# Altium PCB Shield_MMA8452_bleu.PcbDoc
Units mm, origin at the board's own origin, x right, y up, seen from the top; angles counter-clockwise.
Board outline 70 x 57.5 mm, 4 copper layers (Top Layer, Internal Plane 1, Internal Plane 2, Bottom Layer), stack 0.462 mm thick; 7 components, 7 nets, 116 pads, 0 vias.
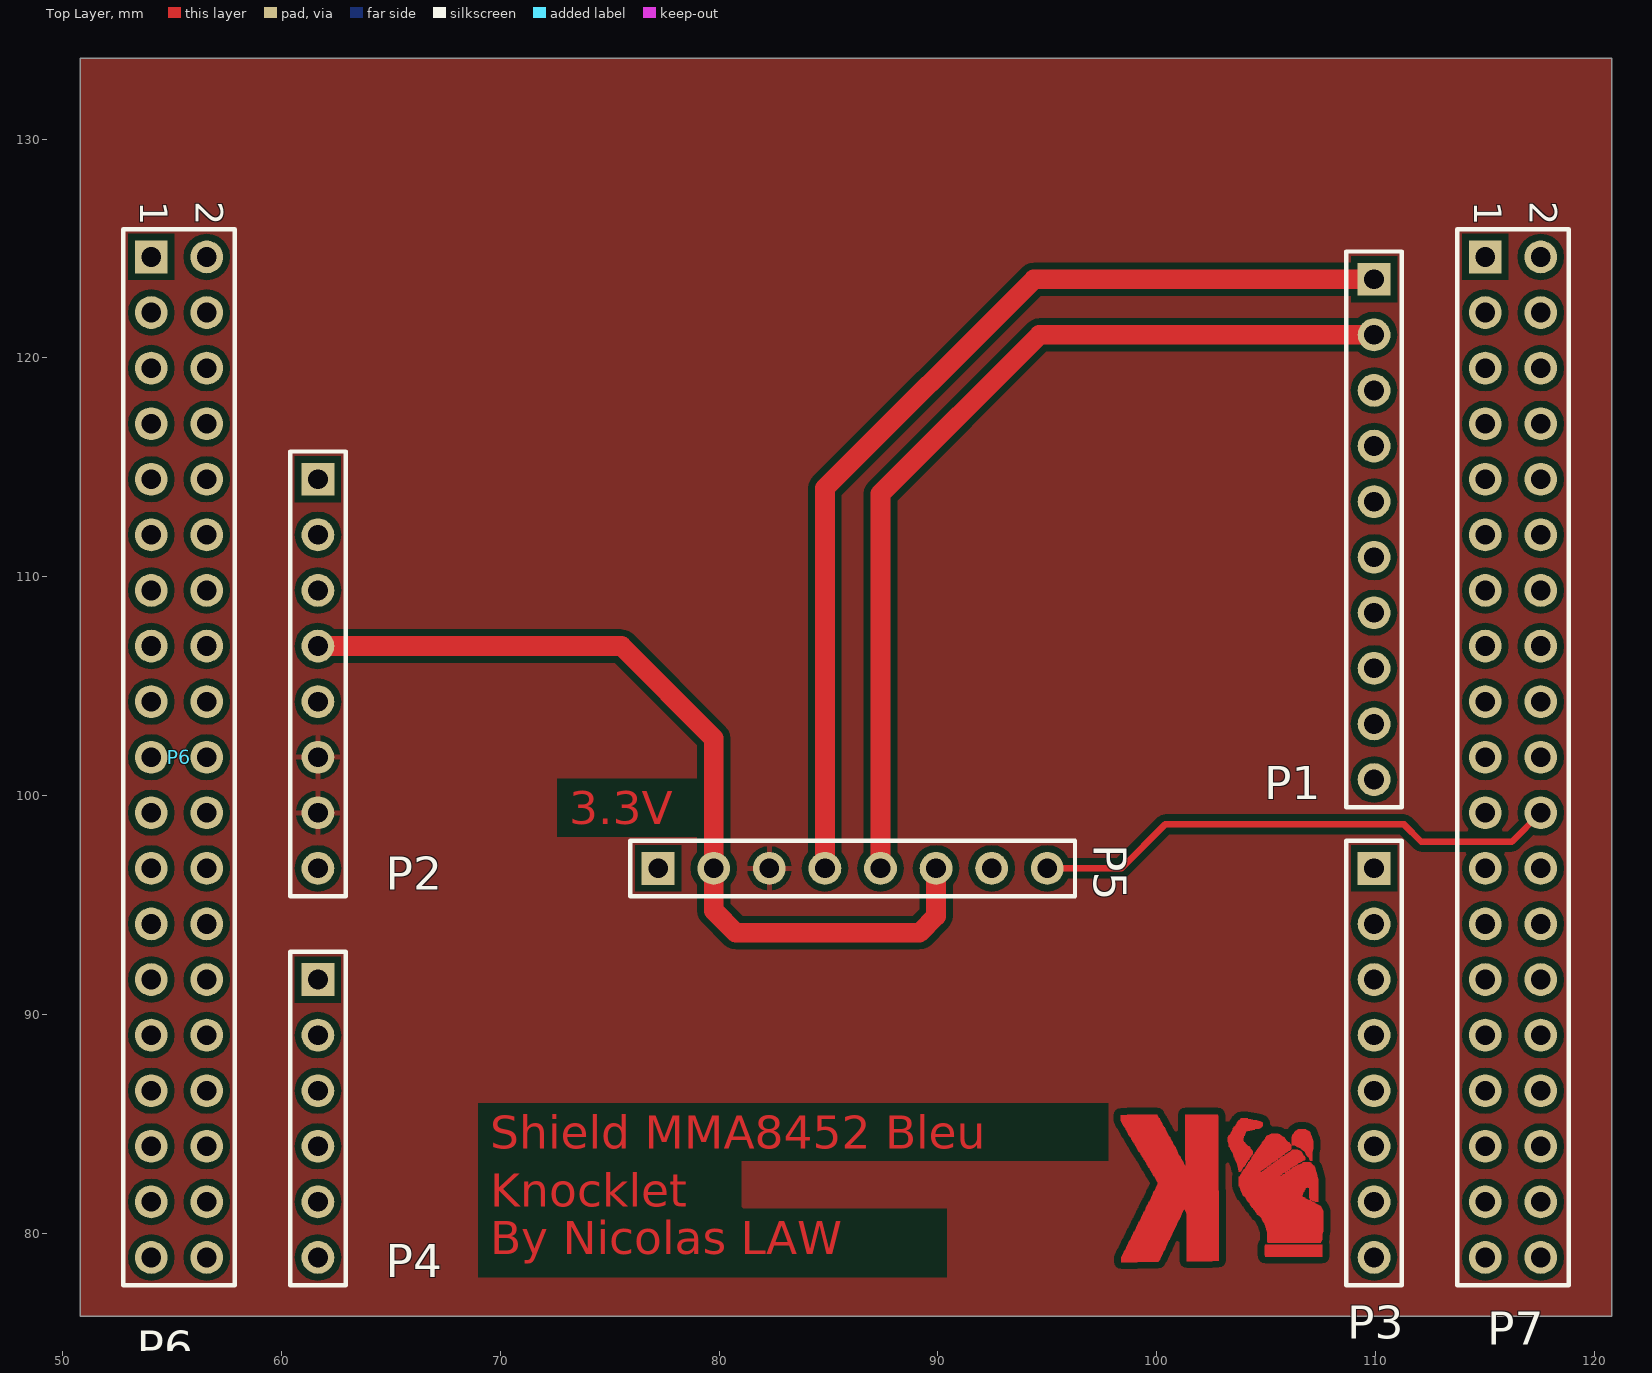
[diagram p0: Top Layer view]
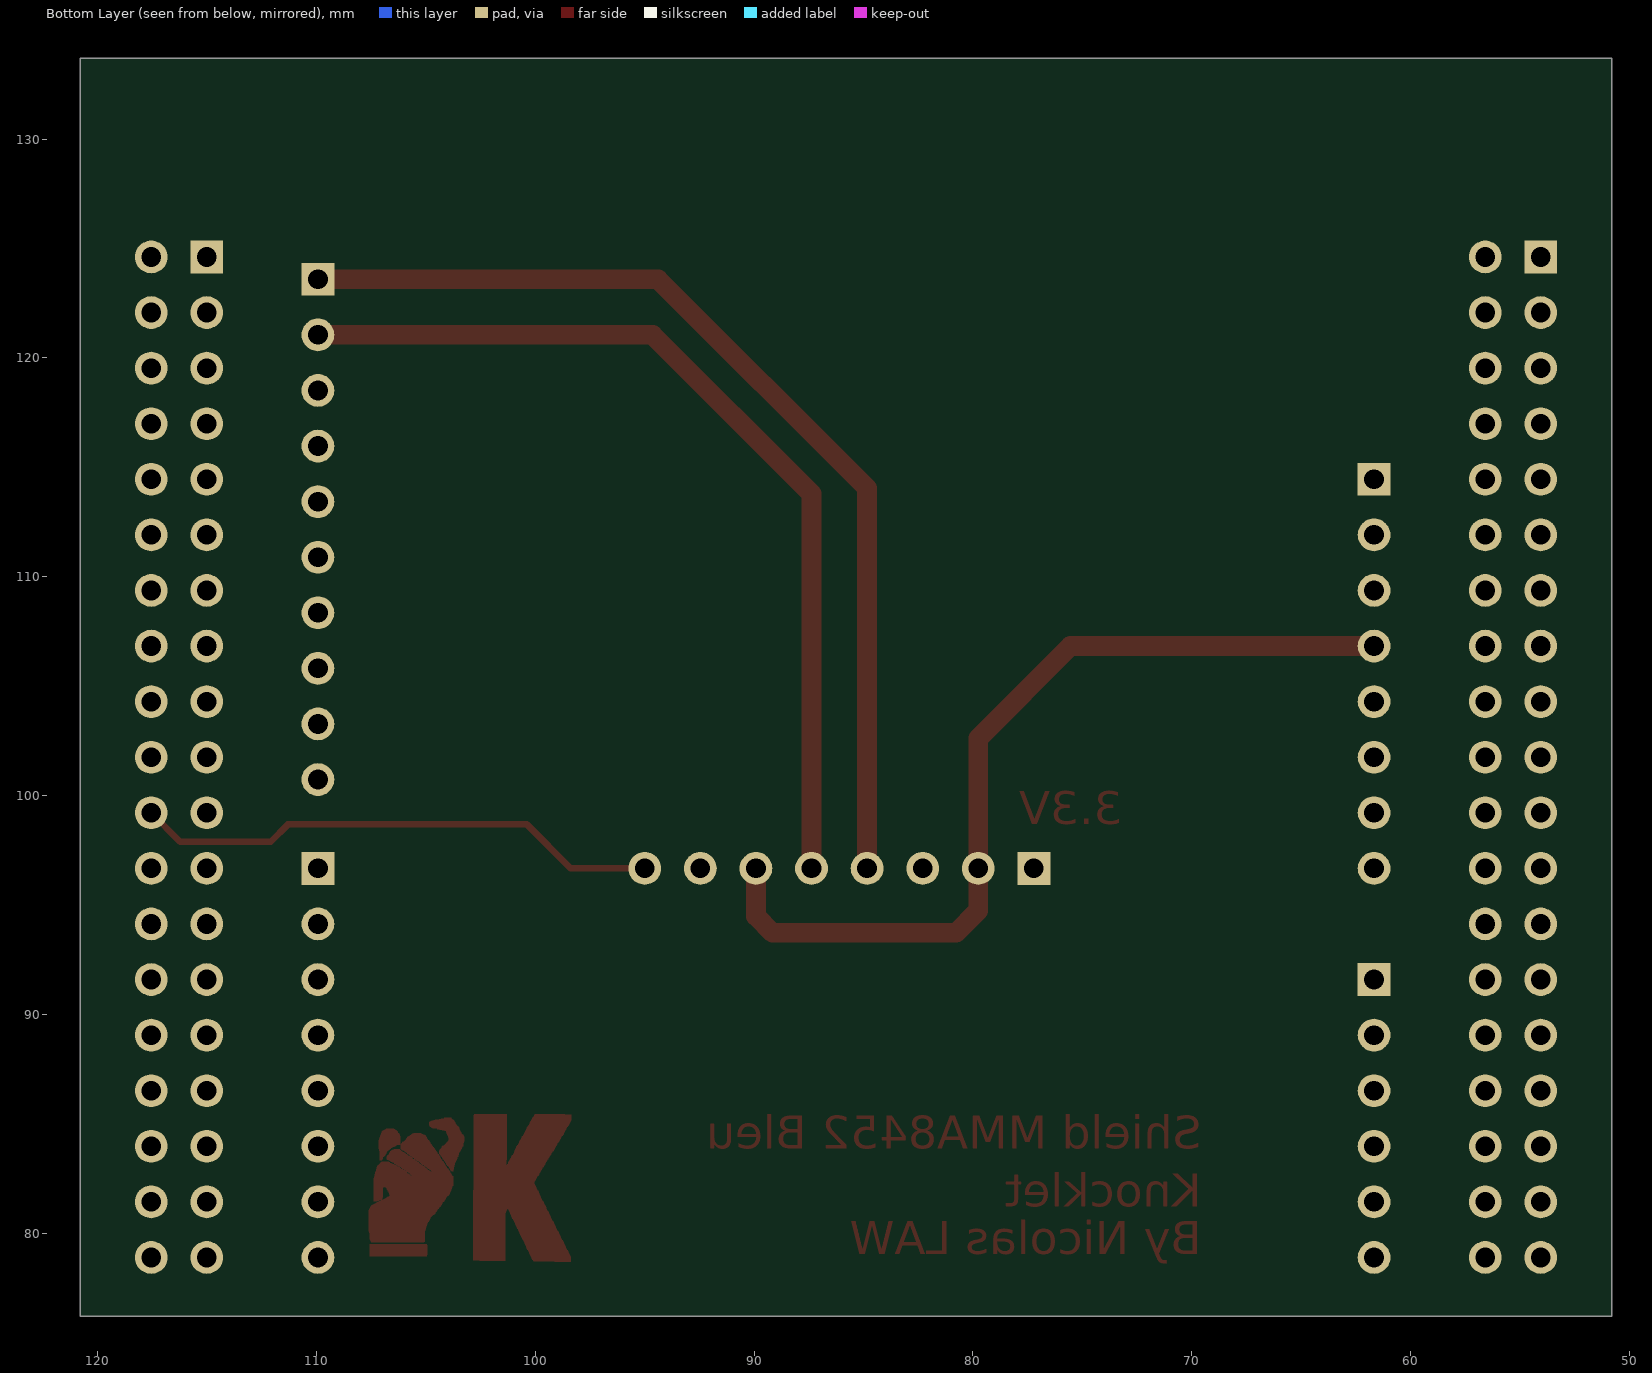
[diagram p1: Bottom Layer view, seen from below]
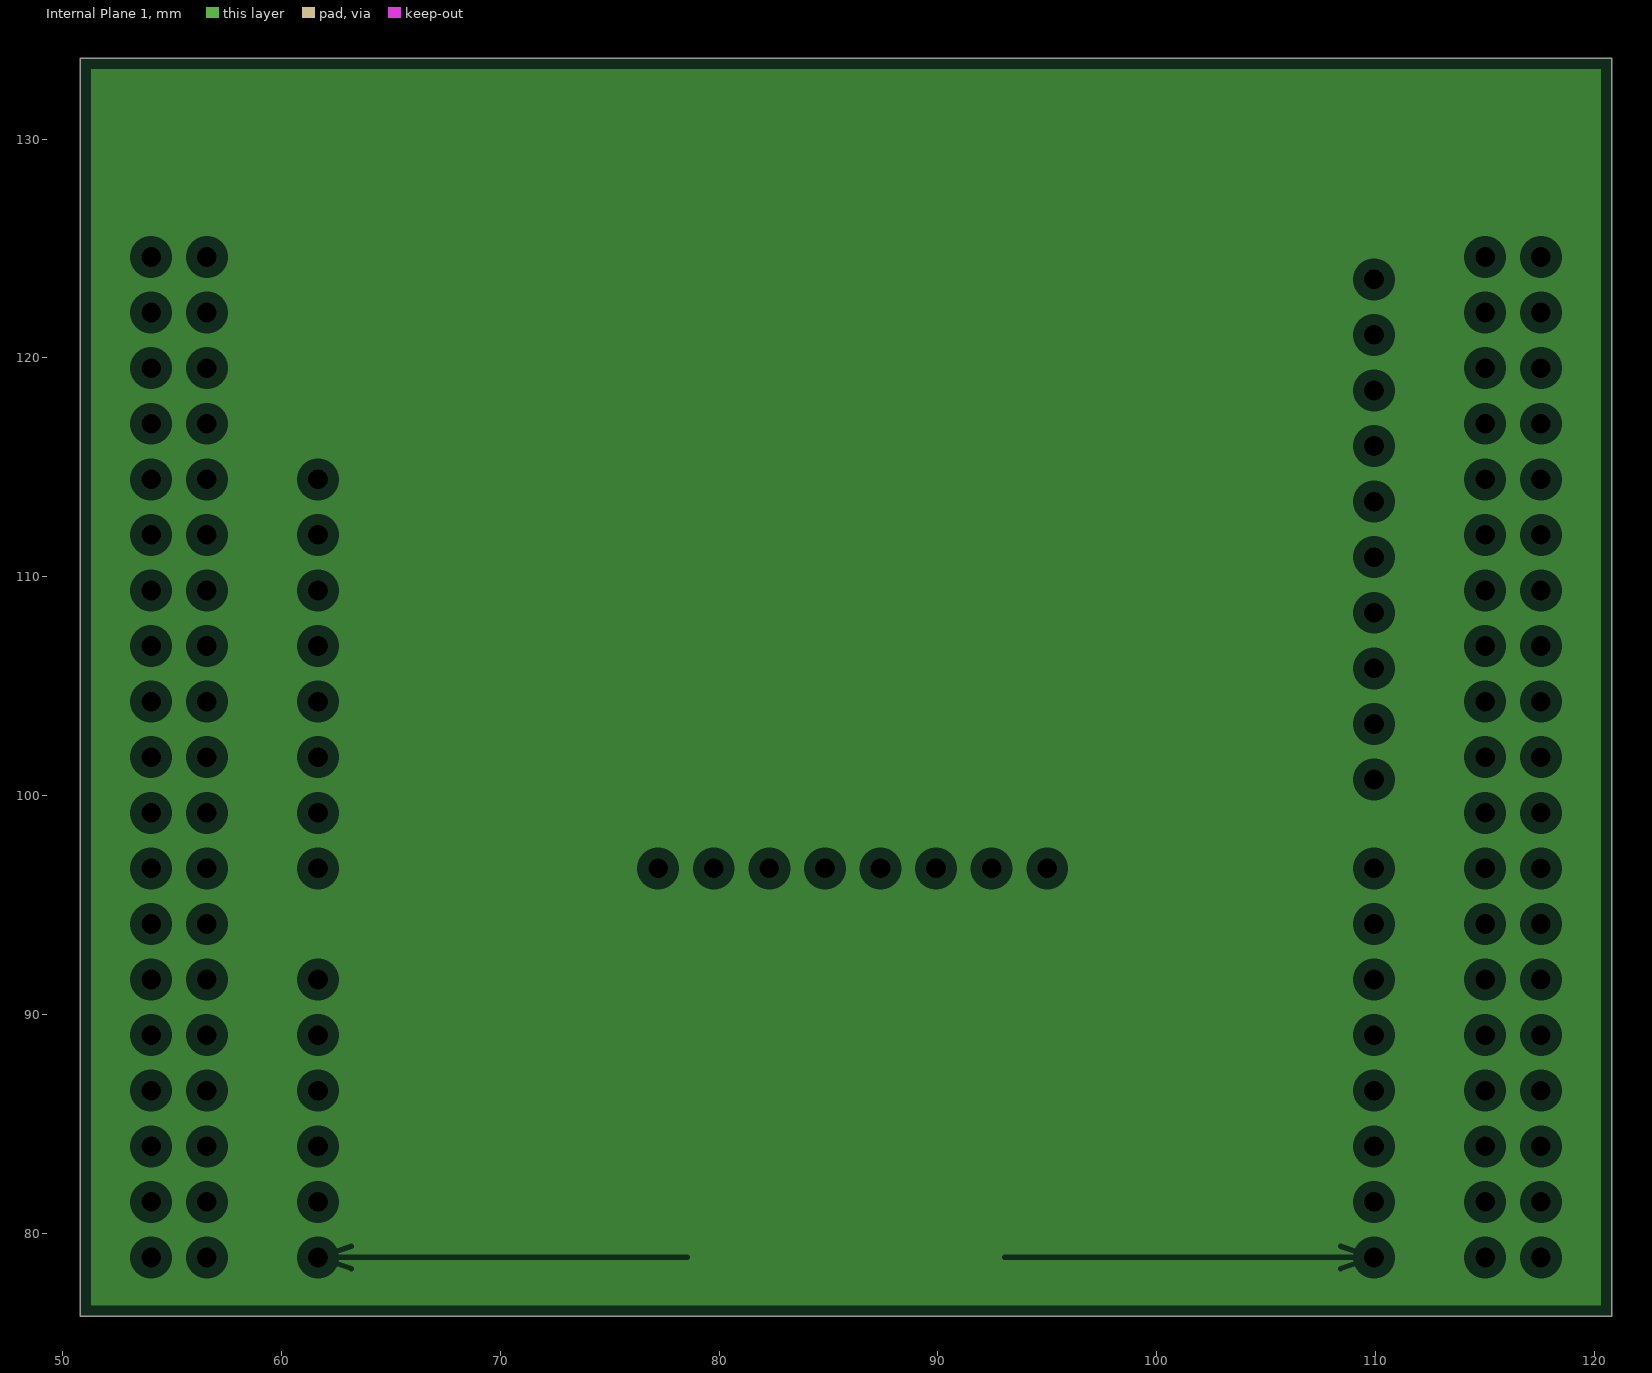
[diagram p2: Internal Plane 1, clearances drawn from the general rule]
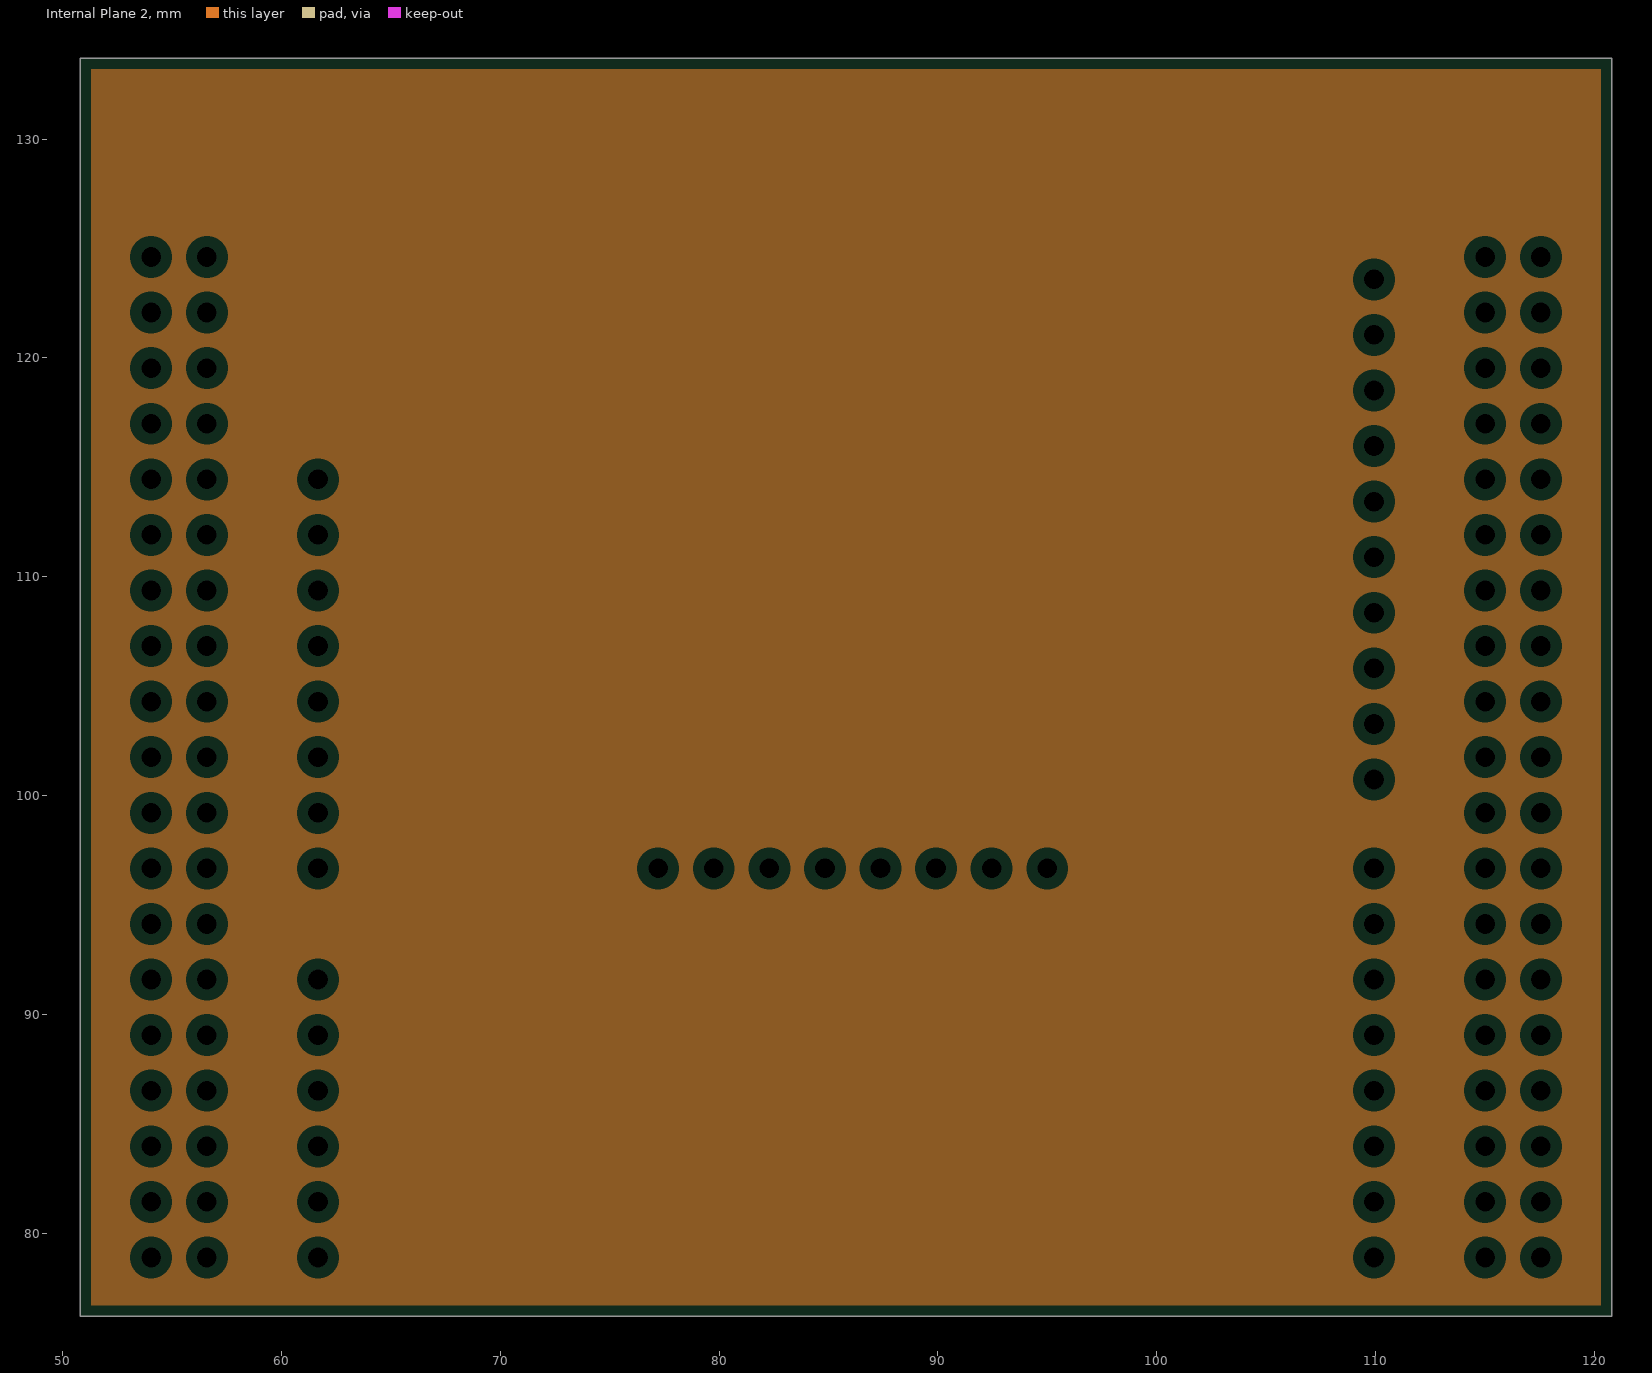
[diagram p3: Internal Plane 2, clearances drawn from the general rule]

## Layer stack, top to bottom
Top Solder: solder mask 0.0102, Solder Resist, Dk 3.5
Top Layer: signal copper 0.0356
Internal Plane 1: plane copper 0.0356
Internal Plane 2: plane copper 0.0356
Dielectric 1: dielectric 0.32, FR-4, Dk 4.8
Bottom Layer: signal copper 0.0356
Bottom Solder: solder mask 0.0102, Solder Resist, Dk 3.5

## Board outline
50.8,76.2 120.8,76.2 120.8,133.7 50.8,133.7

## Design rules (kind name [scope] priority, off if disabled: settings)
Clearance [All] p1: gap=0.3
PlaneClearance [All] p1: clearance=0.508
PlaneConnect [All] p1: planeconnectstyle=Relief reliefexpansion=0.508 reliefentries=4 reliefconductorwidth=0.254 reliefairgap=0.254
PolygonConnect [All] p1: connectstyle=Relief reliefconductorwidth=0.254 reliefentries=4 polygonreliefangle="90 Angle" airgapwidth=0.254
RoutingVias [All] p1: holewidth=0.8 width=1.6 viastyle="Through Hole" minholewidth=0.711 minwidth=1.27 maxholewidth=0.711 maxwidth=1.27
SolderMaskExpansion [All] p1: expansion=0.102
UnpouredPolygon [All] p1: allowunpoured=FALSE
Width [All] p1: maxlimit=0.9 minlimit=0.3 preferedwidth=0.3 bottomlayer_maxwidth=0.3 minimp=50.000000 maximp=50.000000 favimp=50.000000
27 further rules are at their usual default settings.

## Components (designator, comment, footprint, x,y, rotation, side; value= is the part's Value field where it differs from the comment)
P1 "CN5" HDR1X10 109.93,123.592 r270 top
P2 "CN6" HDR1X8 61.67,114.452 r270 top
P3 "CN9" HDR1X8 109.93,96.672 r270 top
P4 "CN8" HDR1X6 61.67,91.592 r270 top
P5 "MMA8452" HDR1X8 77.216,96.672 r0 top
P6 "CN7" HDR2X19 54.05,124.612 r270 top
P7 "CN10" HDR2X19 115.01,124.612 r270 top

## Footprints (in the part's own frame and the unit in brackets; to place one, negate y for a bottom-side part, rotate by r counter-clockwise, add the part's x,y. Pads: shape width x height; smd on the part's side, far side on the other; paste and mask are expansions set on the pad)
HDR1X6 [mm] "Connector; Header; 6 Position"
  rect 1.5x1.5 hole 0.9: 1(0,0)
  round 1.5 hole 0.9: 2(2.54,0) 3(5.08,0) 4(7.62,0) 5(10.16,0) 6(12.7,0)
  silkscreen extent -1.27,-1.27 13.97,1.27
HDR1X8 [mm] "Connector; Header; 8 Position"
  rect 1.5x1.5 hole 0.9: 1(0,0)
  round 1.5 hole 0.9: 2(2.54,0) 3(5.08,0) 4(7.62,0) 5(10.16,0) 6(12.7,0) 7(15.24,0) 8(17.78,0)
  silkscreen extent -1.27,-1.27 19.05,1.27
HDR1X10 [mm] "Connector; Header; 10 Position"
  rect 1.5x1.5 hole 0.9: 1(0,0)
  round 1.5 hole 0.9: 2(2.54,0) 3(5.08,0) 4(7.62,0) 5(10.16,0) 6(12.7,0) 7(15.24,0) 8(17.78,0) 9(20.32,0) 10(22.86,0)
  silkscreen extent -1.27,-1.27 24.13,1.27
HDR2X19 [mm] "Connector; Header; 19x2 Position"
  rect 1.5x1.5 hole 0.9: 1(0,0)
  round 1.5 hole 0.9: 2(0,2.54) 3(2.54,0) 4(2.54,2.54) 5(5.08,0) 6(5.08,2.54) 7(7.62,0) 8(7.62,2.54) 9(10.16,0) 10(10.16,2.54) 11(12.7,0) 12(12.7,2.54) 13(15.24,0) 14(15.24,2.54) 15(17.78,0) 16(17.78,2.54) 17(20.32,0) 18(20.32,2.54) 19(22.86,0) 20(22.86,2.54) 21(25.4,0) 22(25.4,2.54) 23(27.94,0) 24(27.94,2.54) 25(30.48,0) 26(30.48,2.54) 27(33.02,0) 28(33.02,2.54) 29(35.56,0) 30(35.56,2.54) 31(38.1,0) 32(38.1,2.54) 33(40.64,0) 34(40.64,2.54) 35(43.18,0) 36(43.18,2.54) 37(45.72,0) 38(45.72,2.54)
  silkscreen extent -1.27,-1.27 46.99,3.81

## Part data
P1: library part "Header 10", "Header, 10-Pin"
P2 P3 P5: library part "Header 8", "Header, 8-Pin"
P4: library part "Header 6", "Header, 6-Pin"
P6 P7: library part "Header 19X2", "Header, 19-Pin, Dual row"

## Nets (pads, with @x,y where several pads share a name; then routed paths per layer and width w, separated by ;. In a path a pad name is that pad's centre, name@x,y a point inside that pad or via, vN(x,y) a via of type N, cw(c..) or ccw(c..) an arc to the next point about the centre after c; other vN are vias at no path point)
3.3V: P2.4 P5.2 P5.6 | length 40.8
  Top Layer w0.9: P2.4 75.54,106.832 79.756,102.616 P5.2 79.756,94.742 80.772,93.726 89.154,93.726 89.916,94.488 P5.6
GND: P2.6 P2.7 P5.3
INT1: P5.8 P7.22 | length 24.3
  Top Layer w0.3: P5.8 98.374,96.672 100.381,98.679 111.303,98.679 112.09,97.892 116.23,97.892 P7.22
INT2: P5.7
SCL: P1.1 P5.4 | length 46.4
  Top Layer w0.9: P5.4 84.836,114.046 94.382,123.592 P1.1
SDA: P1.2 P5.5 | length 42.7
  Top Layer w0.9: P5.5 87.376,113.792 94.636,121.052 P1.2
VCC_IN: P5.1
pads on no net: P1.3 P1.4 P1.5 P1.6 P1.7 P1.8 P1.9 P1.10 P2.1 P2.2 P2.3 P2.5 P2.8 P3.1 P3.2 P3.3 P3.4 P3.5 P3.6 P3.7 P3.8 P4.1 P4.2 P4.3 P4.4 P4.5 P4.6 P6.1 P6.2 P6.3 P6.4 P6.5 P6.6 P6.7 P6.8 P6.9 P6.10 P6.11 P6.12 P6.13 P6.14 P6.15 P6.16 P6.17 P6.18 P6.19 P6.20 P6.21 P6.22 P6.23 P6.24 P6.25 P6.26 P6.27 P6.28 P6.29 P6.30 P6.31 P6.32 P6.33 P6.34 P6.35 P6.36 P6.37 P6.38 P7.1 P7.2 P7.3 P7.4 P7.5 P7.6 P7.7 P7.8 P7.9 P7.10 P7.11 P7.12 P7.13 P7.14 P7.15 P7.16 P7.17 P7.18 P7.19 P7.20 P7.21 P7.23 P7.24 P7.25 P7.26 P7.27 P7.28 P7.29 P7.30 P7.31 P7.32 P7.33 P7.34 P7.35 P7.36 P7.37 P7.38
copper on no net: | length 1528.3
  Top Layer w0.025: 98.349,85.166 100.152,85.166 ; 98.349,85.192 100.152,85.192 ; 98.349,85.217 100.127,85.217 ; 98.349,85.242 100.127,85.242 ; 98.349,85.268 100.101,85.268 ; 98.349,85.293 100.076,85.293 ; 98.349,85.319 100.076,85.319 ; 98.349,85.344 100.051,85.344 ; 98.349,85.369 100.051,85.369 ; 98.349,85.395 100.025,85.395 ; 98.374,78.689 99.111,78.689 ; 98.374,78.715 100.076,78.715 ; 98.374,78.74 100.101,78.74 ; 98.374,78.765 100.101,78.765 ; 98.374,78.791 100.127,78.791 ; 98.374,78.816 100.127,78.816 ; 98.374,78.842 100.152,78.842 ; 98.374,78.867 100.152,78.867 ; 98.374,78.892 100.178,78.892 ; 98.374,85.115 100.178,85.115 ; 98.374,85.141 100.178,85.141 ; 98.4,78.918 100.178,78.918 ; 98.4,78.943 100.203,78.943 ; 98.4,85.065 100.228,85.065 ; 98.4,85.09 100.203,85.09 ; 98.425,78.969 100.203,78.969 ; 98.425,78.994 100.228,78.994 ; 98.425,85.014 100.254,85.014 ; 98.425,85.039 100.228,85.039 ; 98.45,79.019 100.228,79.019 ; 98.45,79.045 100.254,79.045 ; 98.45,84.988 100.254,84.988 ; 98.476,79.07 100.254,79.07 ; 98.476,79.096 100.279,79.096 ; 98.476,84.938 100.279,84.938 ; 98.476,84.963 100.279,84.963 ; 98.501,79.121 100.279,79.121 ; 98.501,79.146 100.305,79.146 ; 98.501,84.912 100.305,84.912 ; 98.527,79.172 100.305,79.172 ; 98.527,79.197 100.33,79.197 ; 98.527,84.861 100.33,84.861 ; 98.527,84.887 100.33,84.887 ; 98.552,79.223 100.33,79.223 ; 98.552,79.248 100.355,79.248 ; 98.552,84.811 100.355,84.811 ; 98.552,84.836 100.355,84.836 ; 98.577,79.273 100.355,79.273 ; 98.577,79.299 100.381,79.299 ; 98.577,84.76 100.381,84.76 ; 98.577,84.785 100.381,84.785 ; 98.603,79.324 100.381,79.324 ; 98.603,79.35 100.406,79.35 ; 98.603,84.734 100.406,84.734 ; 98.628,79.375 100.406,79.375 ; 98.628,79.4 100.406,79.4 ; 98.628,84.684 100.432,84.684 ; 98.628,84.709 100.406,84.709 ; 98.654,79.426 100.432,79.426 ; 98.654,79.451 100.432,79.451 ; 98.654,84.633 100.457,84.633 ; 98.654,84.658 100.432,84.658 ; 98.654,85.42 100.025,85.42 ; 98.679,79.477 100.457,79.477 ; 98.679,79.502 100.457,79.502 ; 98.679,84.582 100.482,84.582 ; 98.679,84.607 100.457,84.607 ; 98.704,79.527 100.482,79.527 ; 98.704,79.553 100.482,79.553 ; 98.704,84.531 100.508,84.531 ; 98.704,84.557 100.508,84.557 ; 98.73,79.578 100.508,79.578 ; 98.73,79.604 100.508,79.604 ; 98.73,84.506 100.533,84.506 ; 98.755,79.629 100.533,79.629 ; 98.755,79.654 100.533,79.654 ; 98.755,84.455 100.559,84.455 ; 98.755,84.48 100.533,84.48 ; 98.781,79.68 100.559,79.68 ; 98.781,79.705 100.559,79.705 ; 98.781,84.43 100.559,84.43 ; 98.806,79.731 100.584,79.731 ; 98.806,79.756 100.584,79.756 ; 98.806,84.379 100.609,84.379 ; 98.806,84.404 100.584,84.404 ; 98.831,79.781 100.609,79.781 ; 98.831,79.807 100.609,79.807 ; 98.831,84.328 100.635,84.328 ; 98.831,84.353 100.609,84.353 ; 98.857,79.832 100.635,79.832 ; 98.857,79.858 100.635,79.858 ; 98.857,84.303 100.635,84.303 ; 98.882,79.883 100.66,79.883 ; 98.882,79.908 100.66,79.908 ; 98.882,84.252 100.66,84.252 ; 98.882,84.277 100.66,84.277 ; 98.908,79.934 100.686,79.934 ; 98.908,79.959 100.686,79.959 ; 98.908,84.201 100.711,84.201 ; 98.908,84.226 100.686,84.226 ; 98.933,79.985 100.711,79.985 ; 98.933,80.01 100.711,80.01 ; 98.933,84.176 100.711,84.176 ; 98.958,80.035 100.736,80.035 ; 98.958,80.061 100.736,80.061 ; 98.958,84.125 100.736,84.125 ; 98.958,84.15 100.736,84.15 ; 98.984,80.086 100.762,80.086 ; 98.984,80.112 100.762,80.112 ; 98.984,84.074 100.762,84.074 ; 98.984,84.099 100.762,84.099 ; 99.009,80.137 100.787,80.137 ; 99.009,80.162 100.787,80.162 ; 99.009,84.023 100.787,84.023 ; 99.009,84.049 100.787,84.049 ; 99.035,80.188 100.787,80.188 ; 99.035,80.213 100.813,80.213 ; 99.035,83.998 100.813,83.998 ; 99.06,80.239 100.813,80.239 ; 99.06,80.264 100.838,80.264 ; 99.06,83.947 100.838,83.947 ; 99.06,83.972 100.813,83.972 ; 99.085,80.289 100.838,80.289 ; 99.085,80.315 100.863,80.315 ; 99.085,83.896 100.863,83.896 ; 99.085,83.922 100.863,83.922 ; 99.111,80.34 100.863,80.34 ; 99.111,80.366 100.889,80.366 ; 99.111,83.871 100.889,83.871 ; 99.136,80.391 100.889,80.391 ; 99.136,80.416 100.914,80.416 ; 99.136,83.82 100.914,83.82 ; 99.136,83.845 100.889,83.845 ; 99.162,80.442 100.914,80.442 ; 99.162,80.467 100.94,80.467 ; 99.162,83.769 100.94,83.769 ; 99.162,83.795 100.914,83.795 ; 99.187,80.493 100.94,80.493 ; 99.187,80.518 100.965,80.518 ; 99.187,83.744 100.94,83.744 ; 99.212,80.543 100.965,80.543 ; 99.212,80.569 100.99,80.569 ; 99.212,83.693 100.965,83.693 ; 99.212,83.718 100.94,83.718 ; 99.238,80.594 100.99,80.594 ; 99.238,80.62 101.016,80.62 ; 99.238,83.668 100.965,83.668 ; 99.263,80.645 101.016,80.645 ; 99.263,80.67 101.041,80.67 ; 99.263,83.617 100.99,83.617 ; 99.263,83.642 100.99,83.642 ; 99.289,80.696 101.041,80.696 ; 99.289,80.721 101.067,80.721 ; 99.289,83.591 101.016,83.591 ; 99.314,80.747 101.067,80.747 ; 99.314,80.772 101.092,80.772 ; 99.314,83.541 101.041,83.541 ; 99.314,83.566 101.016,83.566 ; 99.339,80.797 101.092,80.797 ; 99.339,80.823 101.092,80.823 ; 99.339,83.515 101.067,83.515 ; 99.365,80.848 101.117,80.848 ; 99.365,80.874 101.117,80.874 ; 99.365,83.464 101.092,83.464 ; 99.365,83.49 101.067,83.49 ; 99.39,80.899 101.143,80.899 ; 99.39,80.924 101.143,80.924 ; 99.39,83.439 101.092,83.439 ; 99.416,80.95 101.168,80.95 ; 99.416,80.975 101.168,80.975 ; 99.416,83.388 101.143,83.388 ; 99.416,83.414 101.117,83.414 ; 99.441,81.001 101.194,81.001 ; 99.441,81.026 101.194,81.026 ; 99.441,83.337 101.168,83.337 ; 99.441,83.363 101.143,83.363 ; 99.466,81.051 101.219,81.051 ; 99.466,81.077 101.219,81.077 ; 99.466,83.287 101.194,83.287 ; 99.466,83.312 101.168,83.312 ; 99.492,81.102 101.244,81.102 ; 99.492,81.128 102.845,81.128 ; 99.492,81.153 102.845,81.153 ; 99.492,83.261 101.219,83.261 ; 99.517,81.178 102.845,81.178 ; 99.517,81.204 102.845,81.204 ; 99.517,83.21 101.244,83.21 ; 99.517,83.236 101.219,83.236 ; 99.543,81.229 102.845,81.229 ; 99.543,81.255 102.845,81.255 ; 99.543,83.16 101.244,83.16 ; 99.543,83.185 101.244,83.185 ; 99.568,81.28 102.845,81.28 ; 99.568,83.134 101.27,83.134 ; 99.593,81.305 102.845,81.305 ; 99.593,81.331 102.845,81.331 ; 99.593,83.083 101.295,83.083 ; 99.593,83.109 101.27,83.109 ; 99.619,81.356 102.845,81.356 ; 99.619,81.382 102.845,81.382 ; 99.619,83.033 102.819,83.033 ; 99.619,83.058 102.819,83.058 ; 99.644,81.407 102.845,81.407 ; 99.644,81.432 102.845,81.432 ; 99.644,83.007 102.819,83.007 ; 99.67,81.458 102.845,81.458 ; 99.67,81.483 102.845,81.483 ; 99.67,82.956 102.819,82.956 ; 99.67,82.982 102.819,82.982 ; 99.695,81.509 102.845,81.509 ; 99.695,81.534 102.845,81.534 ; 99.695,82.906 102.819,82.906 ; 99.695,82.931 102.819,82.931 ; 99.72,81.559 102.845,81.559 ; 99.72,81.585 102.845,81.585 ; 99.72,82.88 102.819,82.88 ; 99.746,81.61 102.845,81.61 ; 99.746,81.636 102.845,81.636 ; 99.746,82.829 102.819,82.829 ; 99.746,82.855 102.819,82.855 ; 99.771,81.661 102.845,81.661 ; 99.771,81.686 102.845,81.686 ; 99.771,82.779 102.819,82.779 ; 99.771,82.804 102.819,82.804 ; 99.797,81.712 102.845,81.712 ; 99.797,81.737 102.845,81.737 ; 99.797,82.753 102.819,82.753 ; 99.822,81.763 102.845,81.763 ; 99.822,81.788 102.845,81.788 ; 99.822,81.813 102.845,81.813 ; 99.822,82.702 102.819,82.702 ; 99.822,82.728 102.819,82.728 ; 99.847,81.839 102.845,81.839 ; 99.847,81.864 102.845,81.864 ; 99.847,82.652 102.819,82.652 ; 99.847,82.677 102.819,82.677 ; 99.873,81.89 102.845,81.89 ; 99.873,81.915 102.845,81.915 ; 99.873,82.626 102.819,82.626 ; 99.898,81.94 102.845,81.94 ; 99.898,81.966 102.819,81.966 ; 99.898,82.575 102.819,82.575 ; 99.898,82.601 102.819,82.601 ; 99.924,81.991 102.819,81.991 ; 99.924,82.017 102.819,82.017 ; 99.924,82.525 102.819,82.525 ; 99.924,82.55 102.819,82.55 ; 99.949,82.042 102.819,82.042 ; 99.949,82.067 102.819,82.067 ; 99.949,82.499 102.819,82.499 ; 99.974,82.093 102.819,82.093 ; 99.974,82.118 102.819,82.118 ; 99.974,82.448 102.819,82.448 ; 99.974,82.474 102.819,82.474 ; 100,82.144 102.819,82.144 ; 100,82.169 102.819,82.169 ; 100,82.398 102.819,82.398 ; 100,82.423 102.819,82.423 ; 100.025,82.194 102.819,82.194 ; 100.025,82.22 102.819,82.22 ; 100.025,82.372 102.819,82.372 ; 100.051,82.245 102.819,82.245 ; 100.051,82.271 102.819,82.271 ; 100.051,82.296 102.819,82.296 ; 100.051,82.321 102.819,82.321 ; 100.051,82.347 102.819,82.347 ; 101.27,81.102 102.845,81.102 ; 101.295,81.051 102.845,81.051 ; 101.295,81.077 102.845,81.077 ; 101.295,83.363 102.819,83.363 ; 101.295,83.388 102.819,83.388 ; 101.295,83.414 102.819,83.414 ; 101.295,83.439 102.819,83.439 ; 101.295,83.464 102.819,83.464 ; 101.295,83.49 102.819,83.49 ; 101.295,83.515 102.819,83.515 ; 101.295,83.541 102.819,83.541 ; 101.295,83.566 102.819,83.566 ; 101.295,83.591 102.819,83.591 ; 101.295,83.617 102.819,83.617 ; 101.295,83.642 102.819,83.642 ; 101.295,83.668 102.819,83.668 ; 101.295,83.693 102.819,83.693 ; 101.295,83.718 102.819,83.718 ; 101.295,83.744 102.819,83.744 ; 101.295,83.769 102.819,83.769 ; 101.295,83.795 102.819,83.795 ; 101.295,83.82 102.819,83.82 ; 101.295,83.845 102.819,83.845 ; 101.295,83.871 102.819,83.871 ; 101.295,83.896 102.819,83.896 ; 101.295,83.922 102.819,83.922 ; 101.295,83.947 102.819,83.947 ; 101.295,83.972 102.819,83.972 ; 101.295,83.998 102.819,83.998 ; 101.295,84.023 102.819,84.023 ; 101.295,84.049 102.819,84.049 ; 101.295,84.074 102.819,84.074 ; 101.295,84.099 102.819,84.099 ; 101.295,84.125 102.819,84.125 ; 101.295,84.15 102.819,84.15 ; 101.295,84.176 102.819,84.176 ; 101.295,84.201 102.819,84.201 ; 101.295,84.226 102.819,84.226 ; 101.295,84.252 102.819,84.252 ; 101.295,84.277 102.819,84.277 ; 101.295,84.303 102.819,84.303 ; 101.295,84.328 102.819,84.328 ; 101.295,84.353 102.819,84.353 ; 101.295,84.379 102.819,84.379 ; 101.295,84.404 102.819,84.404 ; 101.295,84.43 102.819,84.43 ; 101.295,84.455 102.819,84.455 ; 101.295,84.48 102.819,84.48 ; 101.295,84.506 102.819,84.506 ; 101.295,84.531 102.819,84.531 ; 101.295,84.557 102.819,84.557 ; 101.295,84.582 102.819,84.582 ; 101.295,84.607 102.819,84.607 ; 101.295,84.633 102.819,84.633 ; 101.295,84.658 102.819,84.658 ; 101.295,84.684 102.819,84.684 ; 101.295,84.709 102.819,84.709 ; 101.295,84.734 102.819,84.734 ; 101.295,84.76 102.819,84.76 ; 101.295,84.785 102.819,84.785 ; 101.295,84.811 102.819,84.811 ; 101.295,84.836 102.819,84.836 ; 101.295,84.861 102.819,84.861 ; 101.295,84.887 102.819,84.887 ; 101.295,84.912 102.819,84.912 ; 101.295,84.938 102.819,84.938 ; 101.295,84.963 102.819,84.963 ; 101.295,84.988 102.819,84.988 ; 101.295,85.014 102.819,85.014 ; 101.295,85.039 102.819,85.039 ; 101.295,85.065 102.819,85.065 ; 101.295,85.09 102.819,85.09 ; 101.295,85.115 102.819,85.115 ; 101.295,85.141 102.819,85.141 ; 101.295,85.166 102.819,85.166 ; 101.295,85.192 102.819,85.192 ; 101.295,85.217 102.819,85.217 ; 101.295,85.242 102.819,85.242 ; 101.295,85.268 102.819,85.268 ; 101.295,85.293 102.819,85.293 ; 101.295,85.319 102.819,85.319 ; 101.295,85.344 102.819,85.344 ; 101.295,85.369 102.819,85.369 ; 101.295,85.395 102.794,85.395 ; 101.295,85.42 102.794,85.42 ; 101.321,81.001 102.845,81.001 ; 101.321,81.026 102.845,81.026 ; 101.321,83.083 102.819,83.083 ; 101.321,83.109 102.819,83.109 ; 101.321,83.134 102.819,83.134 ; 101.321,83.16 102.819,83.16 ; 101.321,83.185 102.819,83.185 ; 101.321,83.21 102.819,83.21 ; 101.321,83.236 102.819,83.236 ; 101.321,83.261 102.819,83.261 ; 101.321,83.287 102.819,83.287 ; 101.321,83.312 102.819,83.312 ; 101.321,83.337 102.819,83.337 ; 101.346,80.924 102.845,80.924 ; 101.346,80.95 102.845,80.95 ; 101.346,80.975 102.845,80.975 ; 101.371,78.74 102.54,78.74 ; 101.371,78.765 102.845,78.765 ; 101.371,78.791 102.845,78.791 ; 101.371,78.816 102.845,78.816 ; 101.371,78.842 102.845,78.842 ; 101.371,78.867 102.845,78.867 ; 101.371,78.892 102.845,78.892 ; 101.371,78.918 102.845,78.918 ; 101.371,78.943 102.845,78.943 ; 101.371,78.969 102.845,78.969 ; 101.371,78.994 102.845,78.994 ; 101.371,79.019 102.845,79.019 ; 101.371,79.045 102.845,79.045 ; 101.371,79.07 102.845,79.07 ; 101.371,79.096 102.845,79.096 ; 101.371,79.121 102.845,79.121 ; 101.371,79.146 102.845,79.146 ; 101.371,79.172 102.845,79.172 ; 101.371,79.197 102.845,79.197 ; 101.371,79.223 102.845,79.223 ; 101.371,79.248 102.845,79.248 ; 101.371,79.273 102.845,79.273 ; 101.371,79.299 102.845,79.299 ; 101.371,79.324 102.845,79.324 ; 101.371,79.35 102.845,79.35 ; 101.371,79.375 102.845,79.375 ; 101.371,79.4 102.845,79.4 ; 101.371,79.426 102.845,79.426 ; 101.371,79.451 102.845,79.451 ; 101.371,79.477 102.845,79.477 ; 101.371,79.502 102.845,79.502 ; 101.371,79.527 102.845,79.527 ; 101.371,79.553 102.845,79.553 ; 101.371,79.578 102.845,79.578 ; 101.371,79.604 102.845,79.604 ; 101.371,79.629 102.845,79.629 ; 101.371,79.654 102.845,79.654 ; 101.371,79.68 102.845,79.68 ; 101.371,79.705 102.845,79.705 ; 101.371,79.731 102.845,79.731 ; 101.371,79.756 102.845,79.756 ; 101.371,79.781 102.845,79.781 ; 101.371,79.807 102.845,79.807 ; 101.371,79.832 102.845,79.832 ; 101.371,79.858 102.845,79.858 ; 101.371,79.883 102.845,79.883 ; 101.371,79.908 102.845,79.908 ; 101.371,79.934 102.845,79.934 ; 101.371,79.959 102.845,79.959 ; 101.371,79.985 102.845,79.985 ; 101.371,80.01 102.845,80.01 ; 101.371,80.035 102.845,80.035 ; 101.371,80.061 102.845,80.061 ; 101.371,80.086 102.845,80.086 ; 101.371,80.112 102.845,80.112 ; 101.371,80.137 102.845,80.137 ; 101.371,80.162 102.845,80.162 ; 101.371,80.188 102.845,80.188 ; 101.371,80.213 102.845,80.213 ; 101.371,80.239 102.845,80.239 ; 101.371,80.264 102.845,80.264 ; 101.371,80.289 102.845,80.289 ; 101.371,80.315 102.845,80.315 ; 101.371,80.34 102.845,80.34 ; 101.371,80.366 102.845,80.366 ; 101.371,80.391 102.845,80.391 ; 101.371,80.416 102.845,80.416 ; 101.371,80.442 102.845,80.442 ; 101.371,80.467 102.845,80.467 ; 101.371,80.493 102.845,80.493 ; 101.371,80.518 102.845,80.518 ; 101.371,80.543 102.845,80.543 ; 101.371,80.569 102.845,80.569 ; 101.371,80.594 102.845,80.594 ; 101.371,80.62 102.845,80.62 ; 101.371,80.645 102.845,80.645 ; 101.371,80.67 102.845,80.67 ; 101.371,80.696 102.845,80.696 ; 101.371,80.721 102.845,80.721 ; 101.371,80.747 102.845,80.747 ; 101.371,80.772 102.845,80.772 ; 101.371,80.797 102.845,80.797 ; 101.371,80.823 102.845,80.823 ; 101.371,80.848 102.845,80.848 ; 101.371,80.874 102.845,80.874 ; 101.371,80.899 102.845,80.899 ; 103.251,84.201 103.988,84.201 ; 103.251,84.226 103.962,84.226 ; 103.251,84.252 103.962,84.252 ; 103.251,84.277 103.962,84.277 ; 103.251,84.303 103.962,84.303 ; 103.251,84.328 103.962,84.328 ; 103.251,84.353 103.962,84.353 ; 103.251,84.379 103.988,84.379 ; 103.276,84.125 104.038,84.125 ; 103.276,84.15 104.013,84.15 ; 103.276,84.176 103.988,84.176 ; 103.276,84.404 103.988,84.404 ; 103.276,84.43 103.988,84.43 ; 103.302,83.972 104.216,83.972 ; 103.302,83.998 104.165,83.998 ; 103.302,84.023 104.14,84.023 ; 103.302,84.049 104.115,84.049 ; 103.302,84.074 104.089,84.074 ; 103.302,84.099 104.064,84.099 ; 103.302,84.455 103.988,84.455 ; 103.302,84.48 104.013,84.48 ; 103.327,83.922 104.267,83.922 ; 103.327,83.947 104.242,83.947 ; 103.327,84.506 104.013,84.506 ; 103.353,83.871 104.292,83.871 ; 103.353,83.896 104.267,83.896 ; 103.353,84.531 104.013,84.531 ; 103.378,83.845 104.318,83.845 ; 103.378,84.557 104.038,84.557 ; 103.378,84.582 104.038,84.582 ; 103.403,83.795 104.369,83.795 ; 103.403,83.82 104.343,83.82 ; 103.403,84.607 104.064,84.607 ; 103.429,83.744 104.394,83.744 ; 103.429,83.769 104.369,83.769 ; 103.429,84.633 104.064,84.633 ; 103.429,84.658 104.064,84.658 ; 103.454,83.718 104.394,83.718 ; 103.454,84.684 104.14,84.684 ; 103.454,84.709 104.242,84.709 ; 103.48,83.668 104.394,83.668 ; 103.48,83.693 104.394,83.693 ; 103.48,84.734 104.369,84.734 ; 103.48,84.76 104.47,84.76 ; 103.48,84.785 104.673,84.785 ; 103.505,83.591 104.343,83.591 ; 103.505,83.617 104.369,83.617 ; 103.505,83.642 104.394,83.642 ; 103.505,84.811 104.724,84.811 ; 103.53,83.49 104.267,83.49 ; 103.53,83.515 104.292,83.515 ; 103.53,83.541 104.318,83.541 ; 103.53,83.566 104.318,83.566 ; 103.53,84.836 104.75,84.836 ; 103.53,84.861 104.8,84.861 ; 103.556,83.414 104.216,83.414 ; 103.556,83.439 104.242,83.439 ; 103.556,83.464 104.242,83.464 ; 103.556,84.887 104.826,84.887 ; 103.581,83.363 104.191,83.363 ; 103.581,83.388 104.216,83.388 ; 103.581,84.912 104.826,84.912 ; 103.607,83.312 104.165,83.312 ; 103.607,83.337 104.165,83.337 ; 103.607,84.938 104.851,84.938 ; 103.607,84.963 104.851,84.963 ; 103.632,83.261 104.115,83.261 ; 103.632,83.287 104.14,83.287 ; 103.632,84.988 104.851,84.988 ; 103.657,83.21 104.089,83.21 ; 103.657,83.236 104.115,83.236 ; 103.657,85.014 104.851,85.014 ; 103.657,85.039 104.851,85.039 ; 103.683,83.134 104.038,83.134 ; 103.683,83.16 104.064,83.16 ; 103.683,83.185 104.064,83.185 ; 103.683,85.065 104.826,85.065 ; 103.708,83.033 103.962,83.033 ; 103.708,83.058 103.988,83.058 ; 103.708,83.083 104.013,83.083 ; 103.708,83.109 104.013,83.109 ; 103.708,85.09 104.775,85.09 ; 103.708,85.115 104.724,85.115 ; 103.734,82.931 103.886,82.931 ; 103.734,82.956 103.911,82.956 ; 103.734,82.982 103.937,82.982 ; 103.734,83.007 103.937,83.007 ; 103.734,85.141 104.648,85.141 ; 103.759,82.169 107.391,82.169 ; 103.759,82.194 107.391,82.194 ; 103.759,82.22 107.391,82.22 ; 103.759,82.245 107.391,82.245 ; 103.759,82.271 107.391,82.271 ; 103.759,82.296 107.391,82.296 ; 103.759,82.321 107.391,82.321 ; 103.759,82.347 107.391,82.347 ; 103.759,82.372 107.391,82.372 ; 103.759,82.398 107.391,82.398 ; 103.759,82.423 107.391,82.423 ; 103.759,82.448 107.391,82.448 ; 103.759,82.474 107.391,82.474 ; 103.759,82.499 107.391,82.499 ; 103.759,82.525 107.366,82.525 ; 103.759,82.55 107.366,82.55 ; 103.759,82.575 107.34,82.575 ; 103.759,82.829 103.81,82.829 ; 103.759,82.855 103.861,82.855 ; 103.759,82.88 103.861,82.88 ; 103.759,82.906 103.886,82.906 ; 103.759,85.166 104.572,85.166 ; 103.784,82.093 106.858,82.093 ; 103.784,82.118 107.391,82.118 ; 103.784,82.144 107.391,82.144 ; 103.784,82.601 107.34,82.601 ; 103.784,85.192 104.394,85.192 ; 103.81,82.042 106.782,82.042 ; 103.81,82.067 106.807,82.067 ; 103.81,82.626 105.613,82.626 ; 103.81,82.652 105.639,82.652 ; 103.81,85.217 104.292,85.217 ; 103.835,81.966 106.731,81.966 ; 103.835,81.991 106.756,81.991 ; 103.835,82.017 106.782,82.017 ; 103.835,82.677 105.689,82.677 ; 103.835,82.702 105.715,82.702 ; 103.835,85.242 104.165,85.242 ; 103.861,81.915 106.731,81.915 ; 103.861,81.94 106.731,81.94 ; 103.861,82.728 105.74,82.728 ; 103.886,81.864 106.705,81.864 ; 103.886,81.89 106.705,81.89 ; 103.886,82.753 105.791,82.753 ; 103.886,82.779 104.699,82.779 ; 103.911,81.813 106.68,81.813 ; 103.911,81.839 106.705,81.839 ; 103.911,82.804 104.724,82.804 ; 103.937,81.763 106.655,81.763 ; 103.937,81.788 106.68,81.788 ; 103.937,82.829 104.724,82.829 ; 103.937,82.855 104.75,82.855 ; 103.962,81.737 106.655,81.737 ; 103.962,82.88 104.775,82.88 ; 103.988,81.712 106.655,81.712 ; 103.988,82.906 104.826,82.906 ; 103.988,82.931 104.851,82.931 ; 104.013,81.686 106.655,81.686 ; 104.013,82.956 104.902,82.956 ; 104.038,81.661 106.68,81.661 ; 104.038,82.982 104.927,82.982 ; 104.064,81.61 106.782,81.61 ; 104.064,81.636 106.731,81.636 ; 104.064,83.007 104.978,83.007 ; 104.064,83.033 105.004,83.033 ; 104.089,81.585 106.832,81.585 ; 104.089,83.058 105.029,83.058 ; 104.115,81.534 106.934,81.534 ; 104.115,81.559 106.883,81.559 ; 104.115,83.083 105.08,83.083 ; 104.115,83.109 105.105,83.109 ; 104.14,81.509 106.985,81.509 ; 104.14,83.134 105.156,83.134 ; 104.14,83.16 105.181,83.16 ; 104.165,81.458 107.086,81.458 ; 104.165,81.483 107.036,81.483 ; 104.165,83.185 105.207,83.185 ; 104.191,81.432 107.137,81.432 ; 104.191,83.21 105.258,83.21 ; 104.191,83.236 105.283,83.236 ; 104.216,81.407 107.188,81.407 ; 104.216,83.261 105.308,83.261 ; 104.242,81.356 107.29,81.356 ; 104.242,81.382 107.239,81.382 ; 104.242,83.287 105.359,83.287 ; 104.267,81.305 107.391,81.305 ; 104.267,81.331 107.34,81.331 ; 104.267,83.312 105.385,83.312 ; 104.267,83.337 105.435,83.337 ; 104.292,81.28 107.417,81.28 ; 104.292,83.363 105.461,83.363 ; 104.318,81.229 107.493,81.229 ; 104.318,81.255 107.467,81.255 ; 104.318,83.388 105.512,83.388 ; 104.318,83.414 105.537,83.414 ; 104.343,81.204 107.518,81.204 ; 104.343,83.439 105.588,83.439 ; 104.343,83.464 105.613,83.464 ; 104.369,81.178 107.518,81.178 ; 104.369,83.49 105.639,83.49 ; 104.394,83.515 105.689,83.515 ; 104.394,83.541 105.715,83.541 ; 104.419,81.128 107.569,81.128 ; 104.419,81.153 107.544,81.153 ; 104.419,83.566 105.74,83.566 ; 104.419,83.591 105.766,83.591 ; 104.445,81.102 107.569,81.102 ; 104.445,83.617 105.816,83.617 ; 104.47,81.051 107.594,81.051 ; 104.47,81.077 107.594,81.077 ; 104.47,83.642 105.842,83.642 ; 104.47,83.668 105.867,83.668 ; 104.496,81.001 107.62,81.001 ; 104.496,81.026 107.62,81.026 ; 104.496,83.693 105.918,83.693 ; 104.521,80.975 107.62,80.975 ; 104.521,83.718 105.943,83.718 ; 104.546,80.95 107.62,80.95 ; 104.546,83.744 105.994,83.744 ; 104.546,83.769 106.02,83.769 ; 104.572,80.899 107.62,80.899 ; 104.572,80.924 107.62,80.924 ; 104.572,83.795 106.07,83.795 ; 104.597,80.874 107.62,80.874 ; 104.597,83.82 106.096,83.82 ; 104.597,83.845 106.121,83.845 ; 104.623,83.871 106.147,83.871 ; 104.648,80.848 107.62,80.848 ; 104.648,83.896 106.147,83.896 ; 104.673,80.823 107.62,80.823 ; 104.673,83.922 106.147,83.922 ; 104.673,83.947 106.147,83.947 ; 104.699,80.797 107.62,80.797 ; 104.699,83.972 106.147,83.972 ; 104.724,80.772 107.62,80.772 ; 104.724,83.998 106.147,83.998 ; 104.724,84.023 106.147,84.023 ; 104.75,80.747 107.62,80.747 ; 104.75,82.779 105.816,82.779 ; 104.75,84.049 106.121,84.049 ; 104.775,80.721 107.62,80.721 ; 104.775,84.074 106.121,84.074 ; 104.8,80.67 107.62,80.67 ; 104.8,80.696 107.62,80.696 ; 104.8,82.804 105.867,82.804 ; 104.8,84.099 106.096,84.099 ; 104.8,84.125 106.07,84.125 ; 104.826,80.62 107.62,80.62 ; 104.826,80.645 107.62,80.645 ; 104.826,82.829 105.893,82.829 ; 104.826,84.15 106.045,84.15 ; 104.851,80.569 107.62,80.569 ; 104.851,80.594 107.62,80.594 ; 104.851,84.176 105.994,84.176 ; 104.851,84.201 105.969,84.201 ; 104.877,80.518 107.62,80.518 ; 104.877,80.543 107.62,80.543 ; 104.877,82.855 105.918,82.855 ; 104.877,84.226 105.943,84.226 ; 104.902,80.467 107.62,80.467 ; 104.902,80.493 107.62,80.493 ; 104.902,82.88 105.969,82.88 ; 104.902,84.252 105.918,84.252 ; 104.902,84.277 105.893,84.277 ; 104.927,79.019 107.569,79.019 ; 104.927,79.045 107.569,79.045 ; 104.927,79.07 107.569,79.07 ; 104.927,79.096 107.569,79.096 ; 104.927,79.121 107.569,79.121 ; 104.927,79.146 107.569,79.146 ; 104.927,79.172 107.569,79.172 ; 104.927,79.197 107.569,79.197 ; 104.927,79.223 107.569,79.223 ; 104.927,79.248 107.569,79.248 ; 104.927,79.273 107.569,79.273 ; 104.927,79.299 107.569,79.299 ; 104.927,79.324 107.569,79.324 ; 104.927,79.35 107.569,79.35 ; 104.927,79.375 107.569,79.375 ; 104.927,79.4 107.569,79.4 ; 104.927,79.426 107.569,79.426 ; 104.927,80.416 107.62,80.416 ; 104.927,80.442 107.62,80.442 ; 104.927,82.906 105.994,82.906 ; 104.927,84.303 105.893,84.303 ; 104.953,78.943 107.569,78.943 ; 104.953,78.969 107.569,78.969 ; 104.953,78.994 107.569,78.994 ; 104.953,79.451 107.569,79.451 ; 104.953,79.477 107.569,79.477 ; 104.953,80.34 107.62,80.34 ; 104.953,80.366 107.62,80.366 ; 104.953,80.391 107.62,80.391 ; 104.953,82.931 106.045,82.931 ; 104.953,84.328 105.867,84.328 ; 104.953,84.353 105.842,84.353 ; 104.978,80.264 107.62,80.264 ; 104.978,80.289 107.62,80.289 ; 104.978,80.315 107.62,80.315 ; 104.978,82.956 106.07,82.956 ; 104.978,84.379 105.816,84.379 ; 105.004,80.188 107.62,80.188 ; 105.004,80.213 107.62,80.213 ; 105.004,80.239 107.62,80.239 ; 105.004,84.404 105.791,84.404 ; 105.004,84.43 105.74,84.43 ; 105.029,80.112 107.62,80.112 ; 105.029,80.137 107.62,80.137 ; 105.029,80.162 107.62,80.162 ; 105.029,82.982 106.121,82.982 ; 105.029,84.455 105.715,84.455 ; 105.054,79.604 107.493,79.604 ; 105.054,79.629 107.518,79.629 ; 105.054,79.654 107.518,79.654 ; 105.054,79.68 107.544,79.68 ; 105.054,79.705 107.544,79.705 ; 105.054,79.731 107.569,79.731 ; 105.054,79.756 107.569,79.756 ; 105.054,79.781 107.569,79.781 ; 105.054,79.807 107.569,79.807 ; 105.054,79.832 107.569,79.832 ; 105.054,79.858 107.569,79.858 ; 105.054,79.883 107.569,79.883 ; 105.054,79.908 107.569,79.908 ; 105.054,79.934 107.569,79.934 ; 105.054,79.959 107.569,79.959 ; 105.054,79.985 107.569,79.985 ; 105.054,80.01 107.594,80.01 ; 105.054,80.035 107.594,80.035 ; 105.054,80.061 107.594,80.061 ; 105.054,80.086 107.62,80.086 ; 105.054,83.007 106.147,83.007 ; 105.08,83.033 106.197,83.033 ; 105.08,84.48 105.664,84.48 ; 105.105,79.578 107.493,79.578 ; 105.131,83.058 106.248,83.058 ; 105.131,84.506 105.639,84.506 ; 105.156,83.083 106.274,83.083 ; 105.181,84.531 105.613,84.531 ; 105.207,83.109 106.324,83.109 ; 105.232,83.134 106.35,83.134 ; 105.232,84.557 105.562,84.557 ; 105.258,83.16 106.401,83.16 ; 105.308,83.185 106.451,83.185 ; 105.334,83.21 106.477,83.21 ; 105.385,83.236 106.528,83.236 ; 105.41,83.261 106.578,83.261 ; 105.435,83.287 106.629,83.287 ; 105.486,83.312 106.655,83.312 ; 105.512,83.337 106.705,83.337 ; 105.537,83.363 106.756,83.363 ; 105.588,83.388 106.782,83.388 ; 105.613,83.414 106.782,83.414 ; 105.639,83.439 106.782,83.439 ; 105.689,83.464 106.782,83.464 ; 105.715,82.626 107.34,82.626 ; 105.74,82.652 107.34,82.652 ; 105.74,83.49 106.756,83.49 ; 105.766,82.677 107.34,82.677 ; 105.766,83.515 106.756,83.515 ; 105.791,82.702 107.315,82.702 ; 105.816,83.541 106.731,83.541 ; 105.842,82.728 107.315,82.728 ; 105.842,83.566 106.705,83.566 ; 105.867,82.753 107.315,82.753 ; 105.867,83.591 106.705,83.591 ; 105.893,82.779 107.29,82.779 ; 105.918,82.804 107.29,82.804 ; 105.918,83.617 106.68,83.617 ; 105.943,83.642 106.68,83.642 ; 105.969,82.829 107.264,82.829 ; 105.994,82.855 107.264,82.855 ; 105.994,83.668 106.655,83.668 ; 106.045,82.88 107.264,82.88 ; 106.045,83.693 106.629,83.693 ; 106.07,82.906 107.264,82.906 ; 106.096,83.718 106.629,83.718 ; 106.121,82.931 107.239,82.931 ; 106.121,83.744 106.578,83.744 ; 106.147,82.956 107.239,82.956 ; 106.147,83.769 106.553,83.769 ; 106.172,83.795 106.502,83.795 ; 106.172,84.049 107.163,84.049 ; 106.172,84.074 107.163,84.074 ; 106.172,84.099 107.163,84.099 ; 106.172,84.125 107.163,84.125 ; 106.172,84.15 107.163,84.15 ; 106.172,84.176 107.163,84.176 ; 106.172,84.201 107.163,84.201 ; 106.172,84.226 107.163,84.226 ; 106.172,84.252 107.137,84.252 ; 106.172,84.277 107.137,84.277 ; 106.172,84.303 107.137,84.303 ; 106.172,84.328 107.112,84.328 ; 106.172,84.353 107.112,84.353 ; 106.172,84.379 107.086,84.379 ; 106.172,84.404 107.086,84.404 ; 106.197,82.982 107.239,82.982 ; 106.197,83.82 106.451,83.82 ; 106.197,84.43 107.086,84.43 ; 106.197,84.455 107.061,84.455 ; 106.197,84.48 107.061,84.48 ; 106.223,84.506 107.036,84.506 ; 106.223,84.531 107.036,84.531 ; 106.248,83.007 107.213,83.007 ; 106.248,84.557 107.036,84.557 ; 106.274,84.582 107.01,84.582 ; 106.274,84.607 107.01,84.607 ; 106.299,83.033 107.213,83.033 ; 106.299,84.633 106.985,84.633 ; 106.324,83.058 107.188,83.058 ; 106.324,84.023 107.163,84.023 ; 106.324,84.658 106.959,84.658 ; 106.35,84.684 106.934,84.684 ; 106.375,83.083 107.188,83.083 ; 106.375,83.998 107.163,83.998 ; 106.401,83.972 107.163,83.972 ; 106.401,84.709 106.883,84.709 ; 106.426,83.109 107.163,83.109 ; 106.426,84.734 106.832,84.734 ; 106.451,83.947 107.163,83.947 ; 106.477,83.134 107.137,83.134 ; 106.477,84.76 106.807,84.76 ; 106.502,83.922 107.163,83.922 ; 106.528,83.16 107.112,83.16 ; 106.553,83.896 107.163,83.896 ; 106.578,83.185 107.086,83.185 ; 106.604,83.871 107.163,83.871 ; 106.655,83.21 107.061,83.21 ; 106.655,83.845 107.137,83.845 ; 106.68,83.82 107.137,83.82 ; 106.705,83.236 107.01,83.236 ; 106.705,83.795 107.137,83.795 ; 106.731,83.769 107.137,83.769 ; 106.756,83.744 107.112,83.744 ; 106.782,83.693 107.112,83.693 ; 106.782,83.718 107.112,83.718 ; 106.807,83.642 107.112,83.642 ; 106.807,83.668 107.112,83.668 ; 106.832,83.617 107.112,83.617 ; 106.858,83.566 107.112,83.566 ; 106.858,83.591 107.112,83.591 ; 106.883,83.541 107.112,83.541 ; 106.909,82.093 107.391,82.093 ; 106.909,83.515 107.112,83.515 ; 106.934,83.49 107.112,83.49 ; 106.959,81.636 107.391,81.636 ; 106.959,81.661 107.391,81.661 ; 106.959,81.686 107.391,81.686 ; 106.959,81.712 107.391,81.712 ; 106.959,81.737 107.391,81.737 ; 106.959,81.763 107.391,81.763 ; 106.959,81.788 107.391,81.788 ; 106.959,81.813 107.391,81.813 ; 106.959,81.839 107.391,81.839 ; 106.959,81.864 107.391,81.864 ; 106.959,81.89 107.391,81.89 ; 106.959,81.915 107.391,81.915 ; 106.959,81.94 107.391,81.94 ; 106.959,81.966 107.391,81.966 ; 106.959,81.991 107.391,81.991 ; 106.959,82.017 107.391,82.017 ; 106.959,82.042 107.391,82.042 ; 106.959,82.067 107.391,82.067 ; 106.959,83.414 107.112,83.414 ; 106.959,83.439 107.112,83.439 ; 106.959,83.464 107.112,83.464 ; 106.985,81.585 107.391,81.585 ; 106.985,81.61 107.391,81.61 ; 106.985,83.363 107.112,83.363 ; 106.985,83.388 107.112,83.388 ; 107.01,81.534 107.391,81.534 ; 107.01,81.559 107.391,81.559 ; 107.01,83.337 107.112,83.337 ; 107.112,81.509 107.391,81.509 ; 107.163,81.483 107.391,81.483 ; 107.239,81.458 107.391,81.458

## Polygon pours and split planes (outlines as drawn)
GND on Top Layer "Top Layer-No Net" (solid, remove dead copper, pour order 4): 50.8,133.7 50.8,76.2 120.8,76.2 120.8,133.7 50.8,133.7

## Other copper
Top Layer:
  text "3.3V" at 73.152,98.679 h1.52
  text "Shield MMA8452 Bleu" at 69.542,83.871 h1.52
  text "Knocklet" at 69.542,81.204 h1.52
  text "By Nicolas LAW" at 69.542,79.045 h1.52
Internal Plane 1 (plane layer: these items are gaps in the copper):
  lines w0.254: 61.67,78.638 61.67,79.146 ; 63.194,78.384 61.67,78.892 ; 63.194,79.4 61.67,78.892 ; 78.538,78.892 61.67,78.892 ; 93.062,78.892 109.93,78.892 ; 108.406,78.384 109.93,78.892 ; 108.406,79.4 109.93,78.892 ; 109.93,78.638 109.93,79.146
  text "48.26 (mm)" at 78.792,77.978 h1.52

## Dimensions
50.8,76.2 to 120.8,76.2 on Mechanical 1
50.8,76.2 to 50.8,133.7 on Mechanical 1

## Text inside footprints (layer, text, board x,y; h text height)
P6: Top Overlay "1" at 53.542,127.152 h1.27 r270; Top Overlay "2" at 56.082,127.152 h1.27 r270
P7: Top Overlay "1" at 114.502,127.152 h1.27 r270; Top Overlay "2" at 117.042,127.152 h1.27 r270